# EAGLE board 8_POS_0_5MM_PITCH_40MM_LENGTH (EAGLE 9.6.2)
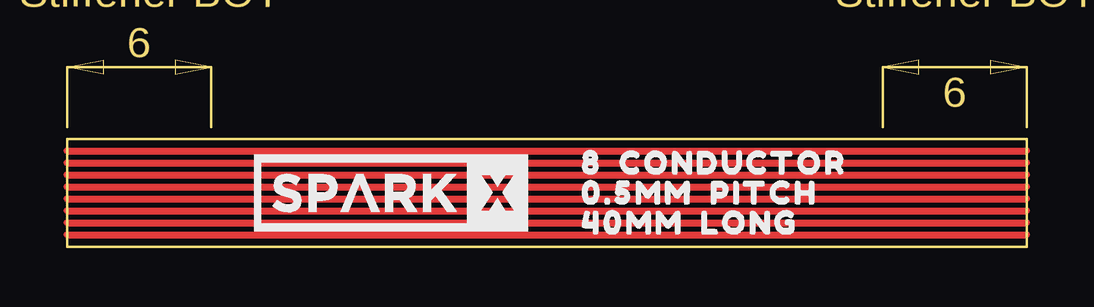
[diagram p0: board, top side]

Size 40 x 4.5 mm. Coordinates in mm from the lower left corner, seen from the top.
Outline: 0,0 0,4.5 40,4.5 40,0 0,0
Copper layers (1*16): Top 0.035mm / dielectric 1.5mm / Bottom 0.035mm
Design rules "default": minimum track width 6mil, minimum drill 0.35mm, track to track 6mil, track to pad 6mil, pad to pad 6mil, via to via 6mil, smd to smd 6mil, copper to edge 40mil, drill to drill 6mil, minimum pad ring 10mil, minimum via ring 8mil, stop-mask expansion 4mil, vias tented up to drill 0mil, thermal gap 10mil

## Placement (x,y rotation side)
E$4  [SPARKX-LARGE]  13.5,2.25 0 top
E$5  [8__CONDUCTOR0]  20.75,3.5 0 top
E$6  [0#5MM__PITCH1]  20.75,2.25 0 top
E$7  [40MM__LONG2]  20.75,1 0 top

## Library data of the parts
E$4 = SparkX
E$5-E$7 = output

## Tracks (layer width: path | path; a pad name or v marks a point on that pad's centre or on a via)
S$1  (7 unrouted)
  Top 0.3: 0,0.5 40,0.5 | 0,1 40,1 | 0,1.5 40,1.5 | 0,2 40,2 | 0,2.5 40,2.5 | 0,3 40,3 | 0,3.5 40,3.5 | 0,4 40,4

## Text on the board
Dimension: Stiffener BOT | Stiffener BOT